# EAGLE board BottomBoards (EAGLE 7.6.0)
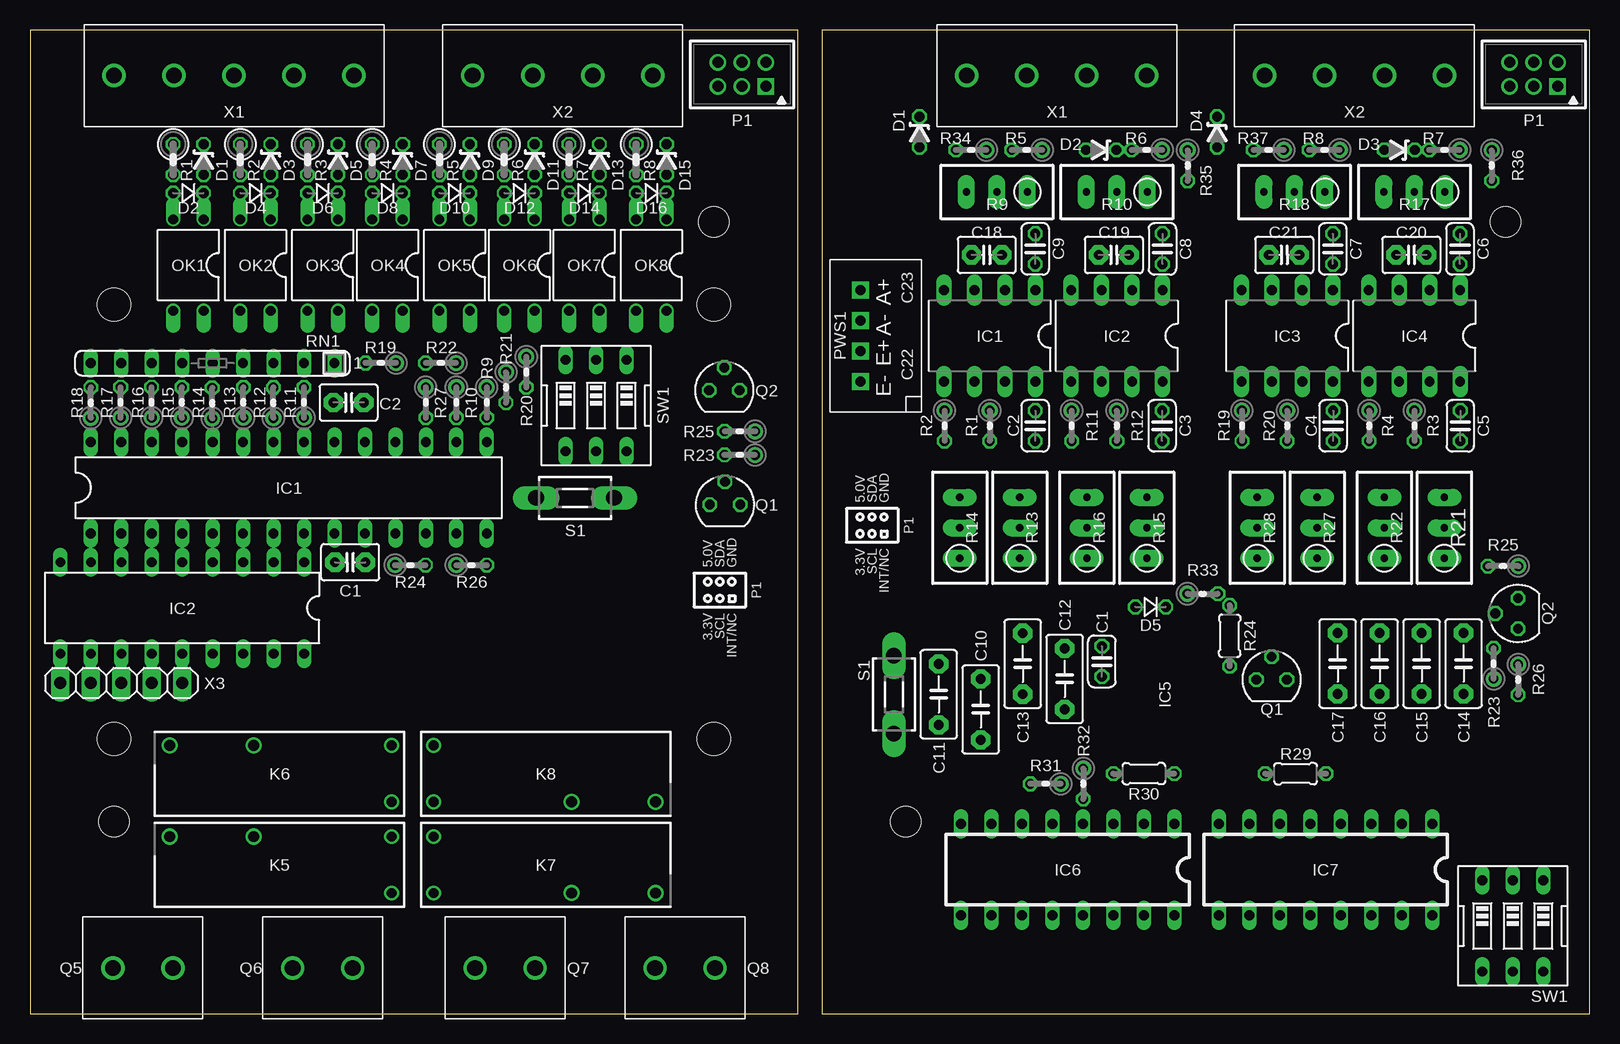
[diagram p0: board, top side]
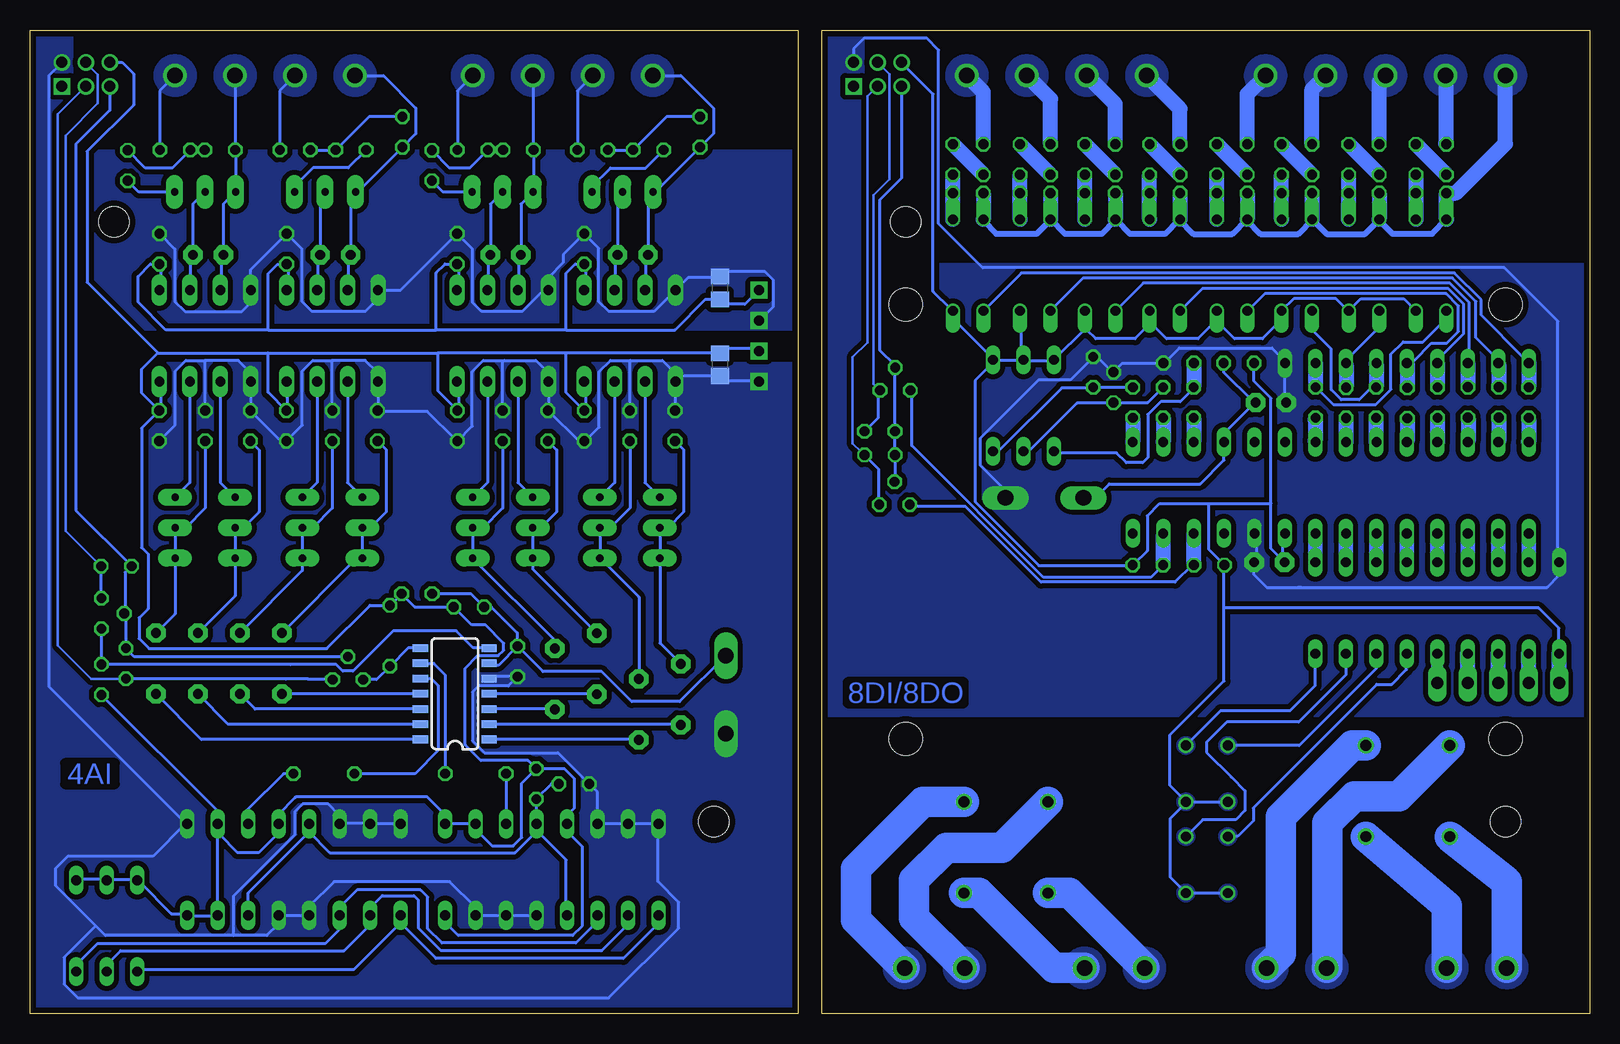
[diagram p1: board, bottom side, seen from below]

Size 130 x 82 mm. Coordinates in mm from the lower left corner, seen from the top.
Outline: 0,0 64,0 64,82 0,82 0,0
Outline: 66,0 130,0 130,82 66,82 66,0
Copper layers (1*16): Top 0.035mm / dielectric 1.6mm / Bottom 0.035mm
Design rules "Elecrow": minimum track width 6mil, minimum drill 12mil, track to track 6mil, track to pad 6mil, pad to pad 6mil, via to via 8mil, smd to smd 0mil, copper to edge 20mil, drill to drill 10mil, minimum pad ring 6mil, minimum via ring 6mil, stop-mask expansion 0mil, vias tented up to drill 100mil, thermal gap 10mil
Holes 2.5 mm at 57,66 7,16 73,16 123,66
Holes 2.75 mm at 57,59.1 57,22.9 7,22.9 7,59.1

## Footprints (pad centres in the part's own frame; a part is rotated, then mirrored left to right if it is on the bottom)
C2.5-3 = drill 0.813 pad 1.6 octagon: 1 -1.27,0; 2 1.27,0
C025-024X044 = drill 0.813 octagon: 1 -1.27,0; 2 1.27,0
C5B3 = drill 0.813 pad 1.6 octagon: 1 -2.54,0; 2 2.54,0
C0805 = smd 1.3 x 1.5: 1 -0.95,0; 2 0.95,0
ZDIO-2.5 = drill 0.813 octagon: A 1.27,0; C -1.27,0
DO35-2V = drill 0.813 octagon: A 1.27,0; C -1.27,0
DIL28-3 = drill 0.813 long: 1 -16.51,-3.81; 2 -13.97,-3.81; 3 -11.43,-3.81; 4 -8.89,-3.81; 5 -6.35,-3.81; 6 -3.81,-3.81; 7 -1.27,-3.81; 8 1.27,-3.81; 9 3.81,-3.81; 10 6.35,-3.81; 11 8.89,-3.81; 12 11.43,-3.81; 13 13.97,-3.81; 14 16.51,-3.81; 15 16.51,3.81; 16 13.97,3.81; 17 11.43,3.81; 18 8.89,3.81; 19 6.35,3.81; 20 3.81,3.81; 21 1.27,3.81; 22 -1.27,3.81; 23 -3.81,3.81; 24 -6.35,3.81; 25 -8.89,3.81; 26 -11.43,3.81; 27 -13.97,3.81; 28 -16.51,3.81
DIL18 = drill 0.813 long: 1 -10.16,-3.81; 2 -7.62,-3.81; 3 -5.08,-3.81; 4 -2.54,-3.81; 5 0,-3.81; 6 2.54,-3.81; 7 5.08,-3.81; 8 7.62,-3.81; 9 10.16,-3.81; 10 10.16,3.81; 11 7.62,3.81; 12 5.08,3.81; 13 2.54,3.81; 14 0,3.81; 15 -2.54,3.81; 16 -5.08,3.81; 17 -7.62,3.81; 18 -10.16,3.81
DIL08 = drill 0.813 pad 1.3 long: 1 -3.81,-3.81; 2 -1.27,-3.81; 3 1.27,-3.81; 4 3.81,-3.81; 5 3.81,3.81; 6 1.27,3.81; 7 -1.27,3.81; 8 -3.81,3.81
14LDSOIC = smd 1.27 x 0.635: 1 -2.87,3.81; 2 -2.87,2.54; 3 -2.87,1.27; 4 -2.87,0; 5 -2.87,-1.27; 6 -2.87,-2.54; 7 -2.87,-3.81; 8 2.87,-3.81; 9 2.87,-2.54; 10 2.87,-1.27; 11 2.87,0; 12 2.87,1.27; 13 2.87,2.54; 14 2.87,3.81
DIL16 = drill 0.813 long: 1 -8.89,-3.81; 2 -6.35,-3.81; 3 -3.81,-3.81; 4 -1.27,-3.81; 5 1.27,-3.81; 6 3.81,-3.81; 7 6.35,-3.81; 8 8.89,-3.81; 9 8.89,3.81; 10 6.35,3.81; 11 3.81,3.81; 12 1.27,3.81; 13 -1.27,3.81; 14 -3.81,3.81; 15 -6.35,3.81; 16 -8.89,3.81
HF46 = drill 0.813: 1 -9.35,2.35; 2 -9.35,-2.35 | drill 0.889: COM 2.15,-2.35 | drill 0.9: NO 9.15,-2.35
DIL04 = drill 0.813 offset: 1 -1.27,-3.81; 2 1.27,-3.81; 3 1.27,3.81; 4 -1.27,3.81
DF11-06DP-2DSA = drill 0.914 square: 1 2,-1 | drill 0.914: 2 2,1; 3 0,-1; 4 0,1; 5 -2,-1; 6 -2,1
TMEXXXXS = drill 0.813 pad 1.397 square: 1 -3.81,1.27; 2 -1.27,1.27; 3 1.27,1.27; 4 3.81,1.27
SOT54E = drill 0.813 octagon: D -1.27,0; G 0,1.905; S 1.27,0
691131710002 = drill 1.3: 1 -2.5,0; 2 2.5,0
0207/2V = drill 0.813 octagon: 1 -1.27,0; 2 1.27,0
0204V = drill 0.813 octagon: 1 -1.27,0; 2 1.27,0
0204/5 = drill 0.813 octagon: 1 -2.54,0; 2 2.54,0
RTRIM3296W = drill 0.61 pad 1.422 long: 1 0,-2.54; 2 0,0; 3 0,2.54
SIL9 = drill 0.813 long: 1 -10.16,0; 2 -7.62,0; 3 -5.08,0; 4 -2.54,0; 5 0,0; 6 2.54,0; 7 5.08,0; 8 7.62,0; 9 10.16,0
DTS-3 = drill 1.3 long: 1 -3.25,0; 2 3.25,0
EDG-03 = drill 0.813 long: 1 -2.54,-3.81; 2 0,-3.81; 3 2.54,-3.81; 4 2.54,3.81; 5 0,3.81; 6 -2.54,3.81
691131710005 = drill 1.3: 1 -10,0; 2 -5,0; 3 0,0; 4 5,0; 5 10,0
691131710004 = drill 1.3: 1 -7.5,0; 2 -2.5,0; 3 2.5,0; 4 7.5,0
1X05 = drill 1.016 long: 1 -5.08,0; 2 -2.54,0; 3 0,0; 4 2.54,0; 5 5.08,0

## Placement (x,y rotation side)
C1  100nF  [C2.5-3]  26.69,37.62 180 top
C2  100nF  [C2.5-3]  26.56,50.94 0 top
C3  100nF  [C025-024X044]  94.37,49 90 top
C4  100nF  [C025-024X044]  108.63,49 90 top
C5  100nF  [C025-024X044]  119.23,49 90 top
C6  100nF  [C025-024X044]  119.2,63.75 90 top
C7  100nF  [C025-024X044]  108.6,63.75 90 top
C8  100nF  [C025-024X044]  94.4,63.75 90 top
C9  100nF  [C025-024X044]  83.8,63.75 90 top
C10  100nF  [C5B3]  79.25,25.35 90 top
C11  100nF  [C025-024X044]  89.35,29.36 270 top
C12  100nF  [C5B3]  86.25,27.9 90 top
C13  100nF  [C5B3]  82.75,29.16 90 top
C14  100nF  [C5B3]  119.5,29.18 270 top
C15  100nF  [C5B3]  116,29.18 270 top
C16  100nF  [C5B3]  112.5,29.18 270 top
C17  100nF  [C5B3]  109,29.18 270 top
C18  10nF  [C2.5-3]  79.75,63.25 0 top
C19  10nF  [C2.5-3]  90.35,63.25 0 top
C20  10nF  [C2.5-3]  115.15,63.25 0 top
C21  100nF  [C025-024X044]  83.8,49 90 top
C22  4.7uF  [C0805]  72.5,54.1 270 bottom
C23  10uF  [C0805]  72.5,60.5 270 bottom
C111  100nF  [C5B3]  75.75,26.61 90 top
C211  10nF  [C2.5-3]  104.55,63.25 0 top
D1  10V  [ZDIO-2.5]  14.47,71.2 270 top
D2  1N4148DO35-2V  [DO35-2V]  13.2,68.4 180 top
D3  10V  [ZDIO-2.5]  20.07,71.2 270 top
D4  1N4148DO35-2V  [DO35-2V]  18.8,68.4 180 top
D5  10V  [ZDIO-2.5]  25.67,71.2 270 top
D6  1N4148DO35-2V  [DO35-2V]  24.4,68.4 180 top
D7  10V  [ZDIO-2.5]  31.07,71.2 270 top
D8  1N4148DO35-2V  [DO35-2V]  29.8,68.4 180 top
D9  10V  [ZDIO-2.5]  36.67,71.2 270 top
D10  1N4148DO35-2V  [DO35-2V]  35.4,68.4 180 top
D11  10V  [ZDIO-2.5]  42.07,71.2 270 top
D12  1N4148DO35-2V  [DO35-2V]  40.8,68.4 180 top
D13  10V  [ZDIO-2.5]  47.47,71.2 270 top
D14  1N4148DO35-2V  [DO35-2V]  46.2,68.4 180 top
D15  10V  [ZDIO-2.5]  53.07,71.2 270 top
D16  1N4148DO35-2V  [DO35-2V]  51.8,68.4 180 top
D17  10V  [ZDIO-2.5]  74.15,73.5 270 top
D21  10V  [ZDIO-2.5]  89.3,72 180 top
D31  10V  [ZDIO-2.5]  114.16,72 180 top
D41  10V  [ZDIO-2.5]  98.95,73.5 270 top
D51  1N4148DO35-2V  [DO35-2V]  93.41,33.9 180 top
IC1  MCP23017SP  [DIL28-3]  21.57,43.84 0 top
IC2  ULN2803A  [DIL18]  12.69,33.81 180 top
IC3  HCPL-7800  [DIL08]  104.8,56.5 180 top
IC4  HCPL-7800  [DIL08]  115.4,56.5 180 top
IC5  MCP3424SOIC  [14LDSOIC]  94.59,26.66 180 bottom
IC6  74HC4051_MUXN  [DIL16]  86.5,12 180 top
IC7  74HC4051_MUXN  [DIL16]  108,12 180 top
IC11  HCPL-7800  [DIL08]  80,56.5 180 top
IC21  HCPL-7800  [DIL08]  90.6,56.5 180 top
K5  HF46105  [HF46]  20.8,12.4 180 top
K6  HF46105  [HF46]  20.8,20 180 top
K7  HF46105  [HF46]  43,12.4 0 top
K8  HF46105  [HF46]  43,20 0 top
OK1  PC817  [DIL04]  13.2,62.4 180 top
OK2  PC817  [DIL04]  18.8,62.4 180 top
OK3  PC817  [DIL04]  24.4,62.4 180 top
OK4  PC817  [DIL04]  29.8,62.4 180 top
OK5  PC817  [DIL04]  35.4,62.4 180 top
OK6  PC817  [DIL04]  40.8,62.4 180 top
OK7  PC817  [DIL04]  46.2,62.4 180 top
OK8  PC817  [DIL04]  51.8,62.4 180 top
P1  DF11-06-2DSA  [DF11-06DP-2DSA]  59.35,78.3 0 top
P11  DF11-06-2DSA  [DF11-06DP-2DSA]  125.35,78.3 0 top
PWS1  TME_0505S  [TMEXXXXS]  70.5,56.5 90 top
Q1  BS170  [SOT54E]  57.93,42.43 0 top
Q2  BS170  [SOT54E]  57.88,51.95 0 top
Q5  691131710002  [691131710002]  9.4,3.8 0 top
Q6  691131710002  [691131710002]  24.4,3.8 0 top
Q7  691131710002  [691131710002]  39.6,3.8 180 top
Q8  691131710002  [691131710002]  54.6,3.8 180 top
Q11  BS170  [SOT54E]  103.5,27.84 0 top
Q21  BS170  [SOT54E]  124.05,33.35 90 top
R1  1K2 0.5W  [0207/2V]  11.93,71.2 270 top
R2  1K2 0.5W  [0207/2V]  17.53,71.2 270 top
R3  1K2 0.5W  [0207/2V]  23.13,71.2 270 top
R4  1K2 0.5W  [0207/2V]  28.53,71.2 270 top
R5  1K2 0.5W  [0207/2V]  34.13,71.2 270 top
R6  1K2 0.5W  [0207/2V]  39.53,71.2 270 top
R7  1K2 0.5W  [0207/2V]  44.93,71.2 270 top
R8  1K2 0.5W  [0207/2V]  50.53,71.2 270 top
R9  1K  [0204V]  38.07,50.94 270 top
R10  1K  [0204V]  35.54,50.94 270 top
R11  1K  [0204V]  22.84,50.94 90 top
R12  1K  [0204V]  20.29,50.92 90 top
R13  1K  [0204V]  17.79,50.94 90 top
R14  1K  [0204V]  15.19,50.89 90 top
R15  1K  [0204V]  12.66,50.94 90 top
R16  1K  [0204V]  10.14,50.95 90 top
R17  1K  [0204V]  7.56,50.95 90 top
R18  1K  [0204V]  5.07,50.93 90 top
R19  10K  [0204V]  29.24,54.23 180 top
R20  10K  [0204V]  41.37,53.48 270 top
R21  10K  [0204V]  39.68,52.2 270 top
R22  10K  [0204V]  34.25,54.23 180 top
R23  1K  [0204V]  59.16,46.57 180 top
R24  1K  [0204V]  31.7,37.39 0 top
R25  1K  [0204V]  59.17,48.54 180 top
R26  1K  [0204V]  36.81,37.39 0 top
R27  1K  [0204V]  32.99,50.94 270 top
R28  1K  [0204V]  76.23,49 270 top
R29  1K  [0204/5]  105.5,20 0 top
R30  1K  [0204/5]  92.85,20 180 top
R31  1K  [0204V]  115.4,49 270 top
R32  4K7  [0204V]  87.8,19.15 270 top
R33  1K  [0204V]  97.75,35 0 top
R34  10K  [0204V]  78.45,72 180 top
R35  10K  [0204V]  96.5,70.7 270 top
R36  10K  [0204V]  121.85,70.7 270 top
R37  10K  [0204V]  103.25,72 180 top
R41  1K  [0204V]  111.63,49 270 top
R51  1K2  [0204V]  83.1,72 180 top
R61  1K2  [0204V]  93.1,72 180 top
R71  1K2  [0204V]  117.9,72 180 top
R81  1K2  [0204V]  107.9,72 180 top
R91  1K  [RTRIM3296W]  80.6,68.5 90 top
R101  1K  [RTRIM3296W]  90.6,68.5 90 top
R110  1K  [0204V]  80,49 270 top
R111  1K  [0204V]  86.83,49 270 top
R121  1K  [0204V]  90.6,49 270 top
R131  1K  [RTRIM3296W]  82.5,40.5 0 top
R141  1K  [RTRIM3296W]  77.5,40.5 0 top
R151  1K  [RTRIM3296W]  93.1,40.5 0 top
R161  1K  [RTRIM3296W]  88.1,40.5 0 top
R171  1K  [RTRIM3296W]  115.4,68.5 90 top
R181  1K  [RTRIM3296W]  105.4,68.5 90 top
R191  1K  [0204V]  101.03,49 270 top
R201  1K  [0204V]  104.8,49 270 top
R211  1K  [RTRIM3296W]  117.9,40.5 0 top
R221  1K  [RTRIM3296W]  112.9,40.5 0 top
R231  1K  [0204V]  122.01,29.18 90 top
R241  1K  [0204/5]  100,31.49 270 top
R251  1K  [0204V]  122.8,37.3 180 top
R261  1K  [0204V]  124.05,27.84 270 top
R271  1K  [RTRIM3296W]  107.3,40.5 0 top
R281  1K  [RTRIM3296W]  102.3,40.5 0 top
R311  4K7  [0204V]  84.65,19.15 180 top
RN1  10K  [SIL9]  15.22,54.22 180 top
S1  DTS-3  [DTS-3]  45.44,42.99 180 top
S11  DTS-3  [DTS-3]  72,26.6 270 top
SW1  [EDG-03]  47.18,50.69 180 top
SW11  [EDG-03]  123.6,7.3 180 top
X1  691131710005  [691131710005]  17,78.2 0 top
X2  691131710004  [691131710004]  44.4,78.2 0 top
X3  [1X05]  7.61,27.55 0 top
X11  691131710004  [691131710004]  85.6,78.2 0 top
X21  691131710004  [691131710004]  110.4,78.2 0 top

## Library data of the parts
C1 C2 = capacitor-wima; MF: MULTICOMP; MPN: MCRR50104X7RK0050; OC_FARNELL: 1216440
C3-C9 C22 C23 R29 R30 R32-R37 = rcl
C10 C12-C20 = capacitor-wima
C11 = rcl; NAME1: C1
C21 = rcl; NAME1: C2
C111 = capacitor-wima; NAME1: C11
C211 = capacitor-wima; NAME1: C21
D1-D16 = diode; OC_FARNELL: unknown
D17 = diode; NAME1: D1
D21 = diode; NAME1: D2
D31 = diode; NAME1: D3
D41 = diode; NAME1: D4
D51 = diode; NAME1: D5
IC1 = microchip; MF: MICROCHIP; MPN: MCP23017-E/SP; OC_FARNELL: 1332088; OC_NEWARK: 31K2959
IC2 = uln-udn; MF: STMICROELECTRONICS; MPN: ULN2803A; OC_FARNELL: 1094428
IC3 IC4 = avago; MPN: HCPL-7800A#500; OC_FARNELL: 459446; OC_NEWARK: 05M6395
IC5 = mcp3424
IC6 IC7 = SparkFun-AnalogIC
IC11 = avago; MPN: HCPL-7800A#500; NAME1: IC1; OC_FARNELL: 459446; OC_NEWARK: 05M6395
IC21 = avago; MPN: HCPL-7800A#500; NAME1: IC2; OC_FARNELL: 459446; OC_NEWARK: 05M6395
K5-K8 = hongfa; OC_FARNELL: unknown; OC_NEWARK: unknown
OK1-OK8 = optocoupler; MF: SHARP; MPN: PC817X4J000F; OC_FARNELL: 9707727; OC_NEWARK: 97K7059
P1 = con-hirose-df11; OC_FARNELL: unknown
P11 = con-hirose-df11; NAME1: P1; OC_FARNELL: unknown
PWS1 = traco-electronic; MPN: TME 0505S; OC_FARNELL: 1007538; OC_NEWARK: 51R5321
Q1 Q2 = transistor-small-signal; MF: ON SEMICONDUCTOR; MPN: BS170G; OC_FARNELL: 9556192
Q5-Q8 X1 X2 = con-wuerth; OC_FARNELL: unknown
Q11 = transistor-small-signal; MF: ON SEMICONDUCTOR; MPN: BS170G; NAME1: Q1; OC_FARNELL: 9556192
Q21 = transistor-small-signal; MF: ON SEMICONDUCTOR; MPN: BS170G; NAME1: Q2; OC_FARNELL: 9556192
R1-R8 = resistor; MF: MULTICOMP; MPN: MCF 0.25W 1K2; OC_FARNELL: 9339124
R9-R22 R27 = resistor; OC_FARNELL: unknown
R23-R26 = rcl; OC_FARNELL: unknown
R28 = rcl; NAME1: R2
R31 = rcl; NAME1: R3
R41 = rcl; NAME1: R4
R51 = rcl; NAME1: R5
R61 = rcl; NAME1: R6
R71 = rcl; NAME1: R7
R81 = rcl; NAME1: R8
R91 = resistor; NAME1: R9
R101 = resistor; NAME1: R10
R110 = rcl; NAME1: R1
R111 = rcl; NAME1: R11
R121 = rcl; NAME1: R12
R131 = resistor; NAME1: R13
R141 = resistor; NAME1: R14
R151 = resistor; NAME1: R15
R161 = resistor; NAME1: R16
R171 = resistor; NAME1: R17
R181 = resistor; NAME1: R18
R191 = rcl; NAME1: R19
R201 = rcl; NAME1: R20
R211 = resistor; NAME1: R21
R221 = resistor; NAME1: R22
R231 = rcl; NAME1: R23; OC_FARNELL: unknown
R241 = rcl; NAME1: R24; OC_FARNELL: unknown
R251 = rcl; NAME1: R25; OC_FARNELL: unknown
R261 = rcl; NAME1: R26; OC_FARNELL: unknown
R271 = resistor; NAME1: R27
R281 = resistor; NAME1: R28
R311 = rcl; NAME1: R31
RN1 = resistor-sil; OC_FARNELL: unknown; OC_NEWARK: unknown
S1 = switch-tact; OC_FARNELL: unknown
S11 = switch-tact; NAME1: S1
SW1 = special; OC_FARNELL: unknown
SW11 = special; NAME1: SW1
X3 = pinhead
X11 = con-wuerth; NAME1: X1
X21 = con-wuerth; NAME1: X2

## Nets
+3V3: P1.5 Q1.G Q2.G R23.2 R25.2
+3V31: P11.5 Q11.G Q21.G R231.2 R251.2
+5V: C1.2 IC1.9 IC2.10 K5.1 K6.1 K7.2 K8.2 OK1.4 OK2.4 OK3.4 OK4.4 OK5.4 OK6.4 OK7.4 OK8.4 P1.6 R19.2 R24.1 R26.2 SW1.1 SW1.2 SW1.3 X3.1
+5V1: C3.2 C4.2 C5.2 C21.2 C22.1 D51.C IC3.8 IC4.8 IC6.1 IC6.2 IC6.5 IC6.16 IC7.2 IC7.4 IC7.15 IC7.16 IC11.8 IC21.8 P11.6 PWS1.2 R32.1 R33.2 R241.1 R261.2 SW11.1 SW11.2 SW11.3
GND: C1.1 C2.1 IC1.10 IC2.9 P1.2 R20.1 R21.1 R22.1 RN1.1 S1.1
GND1: C3.1 C4.1 C5.1 C11.2 C21.1 C22.2 IC3.5 IC4.5 IC5.5 IC6.6 IC6.7 IC6.8 IC6.13 IC6.14 IC6.15 IC7.1 IC7.6 IC7.7 IC7.8 IC7.12 IC7.13 IC11.5 IC21.5 P11.2 PWS1.1 R28.1 R31.1 R41.1 R110.1 R111.1 R121.1 R191.1 R201.1 R311.2 S11.2
N$1: IC1.8 IC2.1
N$2: IC1.7 IC2.2
N$3: IC1.6 IC2.3
N$4: IC1.5 IC2.4
N$5: IC1.4 IC2.5
N$6: IC1.3 IC2.6
N$7: IC1.2 IC2.7
N$8: IC1.1 IC2.8
N$9: D3.C R2.2
N$10: D1.C R1.2
N$11: D2.A D4.A D6.A D8.A D10.A D12.A D14.A D16.A OK1.2 OK2.2 OK3.2 OK4.2 OK5.2 OK6.2 OK7.2 OK8.2 X1.1
N$12: D1.A D2.C OK1.1
N$13: R6.1 X2.2
N$14: R2.1 X1.3
N$15: OK1.3 R11.2 RN1.2
N$16: R3.1 X1.4
N$17: R7.1 X2.3
N$18: R1.1 X1.2
N$19: D3.A D4.C OK2.1
N$20: OK2.3 R12.2 RN1.3
N$21: D5.C R3.2
N$22: R4.1 X1.5
N$23: D5.A D6.C OK3.1
N$24: R5.1 X2.1
N$25: OK3.3 R13.2 RN1.4
N$26: R8.1 X2.4
N$27: D7.C R4.2
N$28: IC2.14 X3.5
N$29: D7.A D8.C OK4.1
N$30: IC2.13 X3.4
N$31: OK4.3 R14.2 RN1.5
N$32: IC2.12 X3.3
N$33: D9.C R5.2
N$34: IC2.11 X3.2
N$35: D9.A D10.C OK5.1
N$36: R22.2 R27.1 SW1.4
N$37: OK5.3 R15.2 RN1.6
N$38: K8.NO Q8.1
N$39: D11.C R6.2
N$40: K8.COM Q8.2
N$41: D11.A D12.C OK6.1
N$42: IC2.15 K5.2
N$43: OK6.3 R16.2 RN1.7
N$44: K7.NO Q7.1
N$45: D13.C R7.2
N$46: K7.COM Q7.2
N$47: D13.A D14.C OK7.1
N$48: IC2.16 K6.2
N$49: OK7.3 R17.2 RN1.8
N$50: IC1.15 R9.2
N$51: D15.C R8.2
N$52: IC1.16 R10.2
N$53: D15.A D16.C OK8.1
N$54: IC2.17 K7.1
N$55: OK8.3 R18.2 RN1.9
N$56: IC2.18 K8.1
N$57: C2.2 IC1.18 R19.1 S1.2
N$58: IC1.12 Q1.D R24.2
N$59: IC1.21 R11.1
N$60: IC1.22 R12.1
N$61: IC1.13 Q2.D R26.1
N$62: IC1.23 R13.1
N$63: IC1.28 R18.1
N$64: IC1.27 R17.1
N$65: IC1.26 R16.1
N$66: K5.NO Q5.1
N$67: IC1.25 R15.1
N$68: IC1.24 R14.1
N$69: P1.4 Q2.S R25.1
N$71: P1.3 Q1.S R23.1
N$75: K5.COM Q5.2
N$77: R9.1 R20.2 SW1.6
N$78: R10.1 R21.2 SW1.5
N$79: IC1.17 R27.2
N$81: C6.1 C7.1 C8.1 C9.1 C23.2 IC3.1 IC4.1 IC11.1 IC21.1 PWS1.4
N$88: K6.NO Q6.1
N$89: K6.COM Q6.2
N$91: IC5.10 R29.1
N$101: IC5.9 R30.1
N$110: C14.2 IC5.14
N$111: C18.2 IC11.2 R91.2
N$121: C19.2 IC21.2 R101.2
N$131: C10.1 IC5.1
N$141: C20.2 IC4.2 R171.2
N$151: C111.1 IC5.2
N$161: C211.1 D41.A IC3.3 R181.3 X21.1
N$171: C12.1 IC5.3
N$181: C12.2 R121.2 R151.1 R151.2
N$191: C211.2 IC3.2 R181.2
N$201: R61.1 X11.4
N$210: C15.2 IC5.13
N$211: D21.C R35.1 R61.2
N$221: IC11.7 R131.3
N$231: IC11.6 R141.3
N$241: C10.2 R110.2 R131.1 R131.2
N$251: IC21.6 R161.3
N$261: IC21.7 R151.3
N$271: C111.2 R28.2 R141.1 R141.2
N$281: R71.1 X21.4
N$291: C13.2 R111.2 R161.1 R161.2
N$301: C18.1 D17.A IC11.3 R91.3 X11.1
N$310: C16.2 IC5.12
N$311: C13.1 IC5.4
N$321: D31.C R36.1 R71.2
N$331: C6.2 C7.2 C8.2 C9.2 C23.1 IC3.4 IC4.4 IC11.4 IC21.4 PWS1.3
N$341: R81.1 X21.2
N$351: D41.C R37.1 R81.2
N$361: IC7.3 R29.2
N$371: IC6.9 IC7.9 SW11.4
N$381: IC4.7 R211.3
N$391: IC4.6 R221.3
N$401: C15.1 R41.2 R221.1 R221.2
N$410: C17.2 IC5.11
N$411: C20.1 D31.A IC4.3 R171.3 X21.3
N$421: C14.1 R31.2 R211.1 R211.2
N$431: IC3.6 R281.3
N$441: IC3.7 R271.3
N$451: C17.1 R191.2 R281.1 R281.2
N$461: C16.1 R201.2 R271.1 R271.2
N$471: IC6.10 IC7.10 SW11.5
N$481: IC6.11 IC7.11 SW11.6
N$491: IC6.3 R30.2
N$510: C19.1 D21.A IC21.3 R101.3 X11.3
N$511: IC6.4 IC6.12 IC7.5 IC7.14 R32.2 R311.1
N$521: C11.1 D51.A IC5.6 R33.1 S11.1
N$531: R34.2 R91.1
N$541: R35.2 R101.1
N$551: R36.2 R171.1
N$561: R37.2 R181.1
N$581: IC5.8 Q11.D R241.2
N$610: R51.1 X11.2
N$611: IC5.7 Q21.D R261.1
N$691: P11.4 Q21.S R251.1
N$710: D17.C R34.1 R51.2
N$711: P11.3 Q11.S R231.1

## Tracks (layer width: path | path; a pad name or v marks a point on that pad's centre or on a via)
+3V3
  Bottom 0.254: Q1.G 57.91,44.5 57.91,46.53 R23.2 57.91,46.74 57.91,48.36 R25.2 57.91,48.56 57.91,53.85 Q2.G 57.91,54.05 59.13,55.27 59.13,67.87 57.51,69.49 57.35,69.65 P1.5
+3V31
  Bottom 0.203: Q21.G 122.12,33.36 122.01,33.36
  Bottom 0.254: R251.2 121.68,37.19 122.08,36.78 122.08,33.53 122.01,33.45 122.01,33.36 R231.2 | 121.47,37.39 R251.2 | 122.03,30.45 R231.2 | Q11.G 121.31,29.75 R231.2 | R251.2 126.17,41.94 126.17,72.49 123.35,75.31 P11.5
+5V
  Bottom 0.203: IC1.9 25.45,40.08 25.44,40.04
  Bottom 0.254: 25.56,39.99 25.56,38.09 25.6,38 25.56,37.88 25.56,37.76 C1.2 26.56,38.76 26.56,42.53 | K8.2 33.73,17.47 34.96,16.24 34.96,11.39 33.73,10.16 K7.2 K5.1 | SW1.2 47.14,54.46 44.7,54.46 SW1.3 44.56,54.6 42.08,57.08 OK6.4 41.96,57.04 41.84,56.95 41.15,56.26 37.89,56.26 36.67,57.48 OK5.4 36.69,57.69 35.26,56.26 32.64,56.26 31.09,57.81 OK4.4 31.06,57.73 29.59,56.26 27.26,56.26 25.67,57.85 OK3.4 | SW1.1 49.58,54.46 47.35,54.46 SW1.2 | OK7.4 47.35,58.52 47.35,54.66 SW1.2 | OK1.4 14.47,58.57 15.5,59.6 19.06,59.6 OK2.4 20.18,58.64 21.14,59.6 24.66,59.6 OK3.4 | OK3.4 | 25.6,40.03 25.56,39.99 | 25.81,58.52 OK3.4 | IC1.9 25.44,40.04 25.56,39.99 | SW1.1 49.78,54.66 53.03,57.91 53.03,58.52 OK8.4 53.24,58.73 54.71,60.2 54.71,76.65 P1.6 57.3,79.25 P1.6 | 49.78,54.46 SW1.1 | R24.1 | 30.47,33.79 30.47,27.72 34.96,23.23 34.96,19.01 33.72,17.77 K8.2 | IC2.10 2.56,30.74 2.56,32.14 4.23,33.81 30.45,33.81 30.47,33.79 | 49.84,54.34 SW1.1 | 30.47,33.79 30.47,37.39 R24.1 | 49.78,54.25 SW1.1 | 26.56,42.53 26.56,51.31 27.96,52.71 R19.2 | SW1.1 49.84,54.14 51.22,52.76 51.22,42.67 45.9,37.35 38.14,37.35 R26.2 38.01,37.42 36.86,38.57 36.86,41.49 35.84,42.51 31.71,42.51 | 31.71,42.51 26.58,42.51 26.56,42.53 | R24.1 31.71,38.67 31.71,42.51 | K8.2 K6.1
  Bottom 1.016: X3.1 2.54,27.26
  Bottom 1.27: 2.54,27.26 IC2.10
  pour Bottom (no thermals): 29.67,9.58 arc180 30.63,10.52 arc180
  pour Bottom (no thermals): 33.17,9.58 arc180 34.13,10.52 arc180
  pour Bottom (no thermals): 33.17,17.18 arc180 34.13,18.12 arc180
  pour Bottom (no thermals): 29.67,17.18 arc180 30.63,18.12 arc180
+5V1
  Bottom 0.254: 85.32,55.07 96,55.07 | 119.33,55.07 110.16,55.07 | 110.16,55.07 96,55.07 | 85.32,55.07 85.32,51.79 C21.2 83.67,50.43 83.67,52.03 83.61,52.49 IC11.8 | 96,55.07 96,51.9 C3.2 94.37,50.47 94.25,50.59 94.25,52.35 IC21.8 | 110.16,55.07 110.16,51.8 C4.2 108.51,50.39 108.51,52.59 IC3.8 | IC6.1 95.26,15.85 93.03,15.85 IC6.2 92.85,15.34 91.49,13.98 89.74,13.98 89.72,13.96 89.01,14.67 89.01,19.19 87.8,20.4 R32.1 | SW11.1 125.94,11.18 123.71,11.18 SW11.2 123.51,11.18 121.07,11.18 SW11.3 120.86,10.97 118.22,8.33 117,8.33 IC7.16 116.8,8.13 114.36,8.13 IC7.15 114.35,14.77 114.2,14.92 | IC4.8 119.1,52.58 119.1,50.4 C5.2 | R32.1 85.47,20.42 84.66,19.61 84.66,17.09 85.22,16.53 IC6.5 | 95.26,8.13 IC6.16 95.37,8.17 95.37,7.56 94.31,6.5 84.77,6.5 83.95,7.32 83.95,13.91 85.22,15.18 IC6.5 | 85.1,15.65 IC6.5 | IC7.4 109.28,15.65 109.28,15.07 110.94,13.41 112.69,13.41 114.2,14.92 | 114.16,15.65 IC7.2 | 95.46,15.85 IC6.1 | 109.28,15.85 IC7.4 | 119.24,50.19 C5.2 | IC7.2 114.36,15.85 114.36,16.88 R261.2 | IC7.4 109.29,15.83 109.29,16.62 107.97,17.94 107.95,17.94 107.84,18.05 96.89,18.05 95.4,16.56 IC6.1 | 114.2,14.92 114.32,15.04 114.32,15.78 IC7.2 | P11.6 122.33,79.3 121.37,78.34 121.37,75.74 125.23,71.88 125.23,60.97 119.33,55.07 | C5.2 120.69,51.73 120.69,53.72 119.34,55.07 119.33,55.07 | R32.1 88.48,21.1 92.42,21.1 93.72,22.4 93.72,28.79 92.67,29.84 90.96,29.84 90.51,30.29 90.51,30.87 92.04,32.4 93.18,32.4 D51.C 97.92,33.9 R33.2 R241.1 101.66,34.03 105.26,30.43 120.08,30.43 120.91,31.26 120.91,33 120.16,33.75 120.16,38.32 120.69,38.85 120.69,48.81 C5.2 | 85.32,55.07 72.52,55.07 C22.1 72.12,55.44 69.44,55.44 PWS1.2
GND
  Bottom 0.254: 28,37.59 27.98,37.76 | 27.74,40.02 27.74,37.67 C1.1 27.96,36.59 26.91,35.54 24.28,35.54 | 27.74,40.02 27.74,40.37 | 24.28,35.54 3.54,35.54 2.53,36.55 IC2.9 2.64,37.8 2.64,57.71 7.11,62.18 50.6,62.18 54.25,65.84 54.25,80.33 55.25,81.32 60.46,81.32 61.35,80.43 P1.2 | 27.74,40.02 IC1.10 | S1.1 48.77,43.08 48.77,43.69 50.8,45.72 50.8,47.95 45.92,52.83 43.28,52.83 41.45,54.66 R20.1 41.02,54.74 39.8,53.52 R21.1 38.94,54.22 R22.1 35.4,54.28 34.19,55.49 26.46,55.49 25.35,54.38 25.5,54.26 RN1.1 25.38,50.98 C2.1 25.38,50.82 | 24.06,35.53 24.28,35.54
  Bottom 0.508: 27.97,37.84 C1.1
  Bottom 1.016: 27.97,37.84 27.98,37.76
  pour Bottom (isolate 0.406, no thermals): 0,62.5 64,62.5 64,24.8 0,24.8
  pour Bottom (isolate 0.406, no thermals): 60.5,82 64,82 64,24.8 29.5,24.8 29.5,62.5 60.5,62.5
GND1
  Bottom 0.203: 113.05,6.62 113.06,6.62 113.06,6.5
  Bottom 0.254: 76.23,52.69 R28.1 | IC21.5 86.79,50.31 R111.1 86.73,50.19 84.29,47.75 83.88,47.75 C21.1 83.68,47.75 82.55,48.88 82.55,53.52 81.62,54.45 79.96,54.45 | 86.93,52.83 IC21.5 | 94.25,47.75 C3.1 | IC6.8 77.79,15.85 80.02,15.85 IC6.7 | IC7.8 99.12,15.85 101.56,15.85 IC7.7 101.76,15.85 104,15.85 IC7.6 | C3.1 93.14,48.96 93.14,53.52 92.21,54.45 90.47,54.45 | 90.47,54.45 87.83,54.45 86.82,53.44 86.82,52.72 IC21.5 | R121.1 90.6,54.32 90.47,54.45 | 79.96,54.45 77.28,54.45 76.24,53.41 76.24,52.74 | R110.1 80,54.41 79.96,54.45 | 80.13,15.83 IC6.7 | 109.29,8.83 109.29,8.74 | 109.29,8.74 109.29,8.21 | 109.27,8.7 109.26,8.71 109.28,8.74 | 87.74,8.33 IC6.13 87.98,8.19 90.21,8.19 IC6.14 90.38,8.13 92.82,8.13 IC6.15 | IC7.12 106.78,8.19 109.02,8.19 IC7.13 | 91.36,27.93 IC5.5 91.45,27.93 91.29,28.09 C11.2 | IC6.7 IC6.6 | 109.28,8.74 109.29,8.74 | 109.28,8.74 IC7.13 | 104.85,54.45 106.43,54.45 107.3,53.58 107.3,49.06 C4.1 109.09,47.73 R41.1 111.59,50.31 IC4.5 111.59,53.4 112.64,54.45 115.4,54.45 | 104.85,54.45 102.06,54.45 100.99,53.38 IC3.5 100.99,50.31 R191.1 100.95,50.19 96.89,50.19 94.45,47.75 C3.1 | R201.1 104.8,54.4 104.85,54.45 | C5.1 117.91,49.05 117.91,53.55 117.01,54.45 115.4,54.45 | R31.1 115.4,54.45 | IC6.6 82.69,18.46 R311.2 85.98,21.75 92.12,21.75 93.11,22.74 93.11,26.81 92.61,27.31 90.13,27.31 C11.2 | 94.45,47.55 C3.1 | 89.17,28.25 C11.2 | P11.2 127.37,79.25 128.38,78.23 128.38,27.23 117,15.85 IC7.1 117.05,15.81 119.75,13.11 126.84,13.11 127.88,12.07 127.88,10.67 124.52,7.32 | 93.03,8.33 IC6.15 | 106.64,8.33 IC7.12 | 104.2,15.85 IC7.6 | 109.28,8.13 IC7.13 | 82.87,15.65 IC6.6 | 124.52,7.32 123.71,6.5 113.06,6.5 110.27,6.5 109.28,7.49 IC7.13
  Bottom 0.254: IC7.6 104.17,15.83 104.17,16.5 105.13,17.46 107.29,17.46 107.93,16.82 107.93,14.91 113.05,9.79 113.05,6.62 113.05,6.6 | 124.52,7.32 127.16,4.67 127.16,2.44 126.02,1.29 81.76,1.29 75.93,7.12 75.93,9.28 77.66,11.01 77.66,15.54 IC6.8 | 77.58,15.65 IC6.8 | IC7.12 106.72,8.94 104.66,11 95.01,11 92.85,8.84 IC6.15 | C3.1 | PWS1.1 69.25,52.71 72.06,52.71 C22.2 75.73,53.15 IC11.5
  pour Bottom (isolate 0.406, no thermals): 66,54.25 130,54.25 130,0 66,0
  pour Bottom (isolate 0.406, no thermals): 126.5,54.25 95.5,54.25 95.5,0 130,0 130,82 126.5,82
N$1
  Bottom 0.508: 22.86,40.34 IC1.8
  Bottom 1.2: 22.86,40.34 IC2.1
N$2
  Bottom 0.508: 20.32,40.35 IC1.7
  Bottom 1.2: 20.32,40.35 IC2.2
N$3
  Bottom 0.508: 17.77,40.4 IC1.6
  Bottom 1.2: 17.77,40.4 IC2.3
N$4
  Bottom 0.508: 15.23,40.35 IC1.5
  Bottom 1.2: 15.23,40.35 IC2.4
N$5
  Bottom 0.508: 12.7,40.24 IC1.4
  Bottom 1.2: 12.7,40.24 IC2.5
N$6
  Bottom 0.508: 10.15,40.53 IC1.3
  Bottom 1.2: 10.15,40.53 IC2.6
N$7
  Bottom 0.508: 7.62,40.6 IC1.2
  Bottom 1.2: 7.62,40.6 IC2.7
N$8
  Bottom 0.508: 5.08,40.37 IC1.1
  Bottom 1.2: 5.08,40.37 IC2.8
N$9
  Bottom 1.27: R2.2 D3.C
N$10
  Bottom 1.27: R1.2 D1.C
N$11
  Bottom 0.508: 12.2,66.2 OK1.2 13.14,65 16.4,65 17.56,66.16 OK2.2 17.54,66.14 17.57,66.14 18.71,65 21.91,65 23.11,66.2 | 23.11,66.2 23.1,66.19 24.29,65 27.43,65 28.58,66.15 OK4.2 28.57,66.22 29.79,65 33.01,65 34.19,66.18 | 23.11,66.2 OK3.2 | 34.19,66.18 OK5.2 | 34.19,66.18 34.24,66.23 34.23,66.19 35.41,65 38.3,65 39.39,66.08 39.62,66.14 OK6.2 39.57,66.09 40.66,65 43.72,65 OK7.2 44.91,66.2 46.11,65 49.45,65 50.5,66.05 50.6,66.11 OK8.2
  Bottom 1.27: OK1.2 D2.A 11.13,68.4 7.01,72.52 X1.1 | D4.A OK2.2 | D6.A OK3.2 | D8.A OK4.2 | D10.A OK5.2 | D12.A OK6.2 | D16.A OK8.2 | D14.A OK7.2
  pour Bottom (no thermals): 5.9,77 arc180 8.1,79.4 arc180
N$12
  Bottom 1.27: D1.A D2.C OK1.1
N$13
  Bottom 1.27: R6.1 39.53,75.83 X2.2
  pour Bottom (no thermals): 40.8,77 arc180 43,79.4 arc180
N$14
  Bottom 1.27: R2.1 17.53,77.67 X1.3
  pour Bottom (no thermals): 15.9,77 arc180 18.1,79.4 arc180
N$15
  Bottom 0.254: OK1.3 11.95,57.93 13.89,55.99 15.54,55.99 16.55,54.98 16.55,52.03 17.82,50.76 21.34,50.76 22.64,52.06 R11.2
  Bottom 0.508: 22.84,52.3 R11.2 | 22.84,54.17 RN1.2
  Bottom 1.27: 22.84,54.17 22.84,52.3
N$16
  Bottom 1.27: R3.1 23.13,77.07 X1.4
  pour Bottom (no thermals): 20.9,77 arc180 23.1,79.4 arc180
N$17
  Bottom 1.27: R7.1 44.93,76.23 X2.3
  pour Bottom (no thermals): 45.8,77 arc180 48,79.4 arc180
N$18
  Bottom 1.27: X1.2 12,72.54 R1.1
  pour Bottom (no thermals): 10.9,77 arc180 13.1,79.4 arc180
N$19
  Bottom 1.27: OK2.1 D4.C D3.A
N$20
  Bottom 0.254: OK2.3 17.54,57.22 20.06,54.7 RN1.3 20.32,54.05 20.29,54.05 | 20.29,52.27 20.32,52.22 R12.2
  Bottom 1.2: 20.29,54.1 20.29,54.05
  Bottom 1.27: 20.29,54.05 20.29,52.27
N$21
  Bottom 1.27: R3.2 D5.C
N$22
  Bottom 1.27: R4.1 28.53,76.67 X1.5
  pour Bottom (no thermals): 25.9,77 arc180 28.1,79.4 arc180
N$23
  Bottom 1.27: OK3.1 D6.C D5.A
N$24
  Bottom 1.27: R5.1 34.13,75.43 X2.1
  pour Bottom (no thermals): 35.8,77 arc180 38,79.4 arc180
N$25
  Bottom 0.254: OK3.3 23.14,57.94 23.14,57.01 21.54,55.41 21.54,52.02 20.7,51.18 19.2,51.18 18.36,52.02 R13.2
  Bottom 0.508: 23.2,58.4 OK3.3 23.2,58.2 | 17.77,52.28 R13.2 | 17.77,54.16 RN1.4
  Bottom 1.27: 17.77,54.16 17.77,52.28
N$26
  Bottom 1.27: R8.1 50.53,76.83 X2.4
  pour Bottom (no thermals): 50.8,77 arc180 53,79.4 arc180
N$27
  Bottom 1.27: R4.2 D7.C
N$28
  Bottom 1.016: X3.5 12.7,27.26 IC2.14
N$29
  Bottom 1.27: OK4.1 D8.C D7.A
N$30
  Bottom 1.016: X3.4 10.15,27.26
  Bottom 1.27: 10.15,27.26 IC2.13
N$31
  Bottom 0.254: OK4.3 28.28,58.68 28.53,58.57 27.08,60.02 11.94,60.02 10.92,59 10.92,56.86 11.9,55.88 13.18,55.88 14.62,54.44 RN1.5
  Bottom 0.508: 28.54,57.92 OK4.3 | 15.2,52.3 R14.2 | 15.2,54.17 RN1.5
  Bottom 1.27: 15.2,54.17 15.2,52.3
N$32
  Bottom 1.016: X3.3 7.62,27.26
  Bottom 1.27: 7.62,27.26 IC2.12
N$33
  Bottom 1.27: R5.2 D9.C
N$34
  Bottom 1.016: X3.2 5.08,27.26
  Bottom 1.27: 5.08,27.26 IC2.11
N$35
  Bottom 1.27: OK5.1 D10.C D9.A
N$36
  Bottom 0.254: R27.1 33.12,52.02 34.12,51.02 35.75,51.02 36.83,49.94 36.83,46.34 37.24,45.92 38.61,45.92 39.42,46.74 44.5,46.74 SW1.4
  Bottom 1.27: R22.2 R27.1
N$37
  Bottom 0.254: OK5.3 34.11,58.59 32.26,60.44 11.78,60.44 10.5,59.16 10.5,56.68 12.44,54.74 RN1.6
  Bottom 0.508: 12.68,52.27 R15.2 | 12.68,54.15 RN1.6
  Bottom 1.27: 12.68,54.15 12.68,52.27
N$38
  Bottom 2.54: Q8.1 57.13,3.8 61.12,7.79 61.16,7.83 61.16,12.06 55.57,17.65 K8.NO
  pour Bottom (no thermals): 56,2.6 arc180 58.2,5 arc180
N$39
  Bottom 1.27: R6.2 D11.C
N$40
  Bottom 2.54: K8.COM 48.97,13.83 53.61,13.83 56.3,11.14 56.3,8 Q8.2
  pour Bottom (no thermals): 51,2.6 arc180 53.2,5 arc180
N$41
  Bottom 1.27: OK6.1 D12.C D11.A
N$42
  Bottom 0.254: 30.15,14.78 K5.2 30.12,14.78 29.32,14.78 28.04,16.06 28.04,17.14 17.73,27.45 16.5,27.45 15.27,28.68 15.27,29.96 IC2.15
  pour Bottom (no thermals): 29.67,14.28 arc180 30.63,15.22 arc180
N$43
  Bottom 0.254: OK6.3 39.16,58.72 39.53,58.57 37.2,60.9 11.66,60.9 10.04,59.28 10.04,54.74 RN1.7
  Bottom 0.508: 39.4,58.6 OK6.3 | 10.13,52.27 R16.2 | 10.13,54.15 RN1.7
  Bottom 1.27: 10.13,54.15 10.13,52.27
N$44
  Bottom 2.54: K7.NO 50.89,10.05 44.64,3.8 Q7.1
  pour Bottom (no thermals): 41,2.6 arc180 43.2,5 arc180
N$45
  Bottom 1.27: R7.2 D13.C
N$46
  Bottom 2.54: K7.COM 43.35,10.05 Q7.2
  pour Bottom (no thermals): 36,2.6 arc180 38.2,5 arc180
N$47
  Bottom 1.27: OK7.1 D14.C D13.A
N$48
  Bottom 0.254: IC2.16 17.77,28.75 24.19,22.34 K6.2
  pour Bottom (no thermals): 29.67,21.88 arc180 30.63,22.82 arc180
N$49
  Bottom 0.254: OK7.3 44.92,58.62 42.22,61.32 11.42,61.32 9.46,59.36 9.46,56.34 7.82,54.7 RN1.8
  Bottom 0.508: 7.58,52.23 R17.2 | 7.58,54.1 RN1.8
  Bottom 1.27: 7.58,54.1 7.58,52.23
N$50
  Bottom 0.254: R9.2
  Bottom 1.27: R9.2 IC1.15
N$51
  Bottom 1.27: R8.2 D15.C
N$52
  Bottom 1.27: R10.2 IC1.16
N$53
  Bottom 1.27: OK8.1 D16.C D15.A
N$54
  Bottom 0.254: K7.1 33.63,14.75 32.23,16.15 29.49,16.15 28.72,16.92 28.72,18.58 29.86,19.72 31.92,21.78 31.92,22.61 30.23,24.3 24.24,24.3 20.32,28.23 IC2.17
  pour Bottom (no thermals): 33.17,14.28 arc180 34.13,15.22 arc180
N$55
  Bottom 0.254: RN1.9 5.46,54.66 9.04,58.24 9.04,59.52 11.26,61.74 47.36,61.74 50.56,58.54 OK8.3 | R18.2 5.08,52.22 5.06,52.38
  Bottom 1.27: RN1.9 5.06,52.38
N$56
  Bottom 0.254: K8.1 30.74,25.26 28.11,25.26 24.95,25.26 22.86,27.35 IC2.18
  pour Bottom (no thermals): 33.17,21.88 arc180 34.13,22.82 arc180
N$57
  Bottom 0.254: R19.1 30.48,54.05 30.48,53.44 28.04,51 C2.2 28.04,50.8 30.28,48.56 30.28,47.75 IC1.18 | 30.48,47.55 IC1.18 | S1.2 41.21,42.99 40.04,44.16 32.44,44.16 30.47,46.13 IC1.18
N$58
  Bottom 0.254: 33,37.64 R24.2 | 33,39.88 IC1.12 | 32.92,37.39 R24.2 | Q1.D 56.49,42.27 52.02,42.27 45.72,35.97 34.54,35.97 33.12,37.39 R24.2
  Bottom 1.27: 33,39.88 33,37.64
N$59
  Bottom 0.254: IC1.21 22.96,47.75 22.86,47.75
  Bottom 0.508: 22.86,49.51 R11.1
  Bottom 1.2: 22.86,47.75 22.86,47.63
  Bottom 1.27: 22.86,49.51 22.86,47.75
N$60
  Bottom 0.508: IC1.22 | 20.3,49.53 R12.1
  Bottom 1.27: 20.3,49.53 IC1.22
N$61
  Bottom 0.254: 35.56,37.57 R26.1 35.56,37.39 36.58,36.37 45.52,36.37 56.49,47.35 56.49,51.82 Q2.D | 35.56,39.81 IC1.13
  Bottom 1.27: 35.56,39.81 35.56,37.57
N$62
  Bottom 0.508: 17.8,47.67 IC1.23 | 17.8,49.55 R13.1
  Bottom 1.27: 17.8,49.55 17.8,47.67
N$63
  Bottom 0.508: 5.08,47.66 IC1.28 | 5.08,49.53 R18.1
  Bottom 1.27: 5.08,49.53 5.08,47.66
N$64
  Bottom 0.508: 7.58,47.71 IC1.27 | 7.58,49.59 R17.1
  Bottom 1.27: 7.58,49.59 7.58,47.71
N$65
  Bottom 0.508: 10.12,47.75 IC1.26 | 10.12,49.62 R16.1
  Bottom 1.27: 10.12,49.62 10.12,47.75
N$66
  Bottom 2.54: K5.NO 6.9,11 Q5.1
  pour Bottom (no thermals): 5.8,2.6 arc180 8,5 arc180
N$67
  Bottom 0.508: 12.68,47.67 IC1.25 | 12.68,49.55 R15.1
  Bottom 1.27: 12.68,49.55 12.68,47.67
N$68
  Bottom 0.508: 15.2,47.73 IC1.24 | 15.2,49.48 R14.1
  Bottom 1.27: 15.2,49.48 15.2,47.73
N$69
  Bottom 0.203: 59.28,51.82 Q2.S 59.25,52.02 59.7,52.47 59.7,68.23 58.35,69.58 58.35,78.3 P1.4 | 60.35,48.62 R25.1
  Bottom 0.254: 59.28,51.82 59.28,49.68 60.35,48.62
N$71
  Bottom 0.203: P1.3 60.18,76.48 60.18,56 60.2,55.93 61.42,54.71 61.42,47.54 60.71,46.83 60.5,46.63 R23.1 60.35,46.48 | 59.28,42.52 Q1.S
  Bottom 0.254: 59.28,42.52 59.28,45.41 60.35,46.48
N$75
  Bottom 2.54: K5.COM 11.9,9 Q5.2
  pour Bottom (no thermals): 10.8,2.6 arc180 13,5 arc180
N$77
  Bottom 0.254: R9.1 R20.2 41.48,52.16 43.98,52.16 49.26,46.88 SW1.6
N$78
  Bottom 0.254: R10.1 35.57,52.2 36.83,50.94 R21.2 39.8,50.88 42.72,50.88 46.72,46.88 SW1.5
N$79
  Bottom 0.254: R27.2
  Bottom 1.27: R27.2 IC1.17
N$81
  Bottom 0.254: 94.45,60.15 IC21.1 94.41,60.76 94.28,60.89 94.28,62.36 C8.1 95.41,62.49 96.13,61.77 96.13,57 | IC3.1 108.61,60.73 108.48,60.86 108.48,62.36 C7.1 109.36,62.47 110.13,61.7 110.13,57 | 110.13,57 96.13,57 | IC11.1 83.81,60.7 83.67,60.84 83.67,62.35 C9.1 84.55,62.49 85.3,61.74 85.3,57 | IC4.1 119.21,60.79 119.09,60.91 119.09,62.37 C6.1 119.97,62.48 121,61.45 121,59.33 118.67,57 110.13,57 | 85.3,57 96.13,57 | 85.3,57 76.24,57 73.69,59.55 C23.2 72.4,59.55 71.98,59.13 70.41,59.13 PWS1.4
N$88
  Bottom 2.54: K6.NO 15.88,18.12 17.48,18.12 19.61,18.12 21.85,15.88 21.85,3.85 Q6.1
  pour Bottom (no thermals): 20.8,2.6 arc180 23,5 arc180
N$89
  Bottom 2.54: K6.COM 19.78,22.35 25.73,16.4 25.73,4.97 Q6.2
  pour Bottom (no thermals): 25.8,2.6 arc180 28,5 arc180
N$91
  Bottom 0.254: IC5.10 96.57,27.93 95.99,27.35 95.99,21.92 97.91,20 R29.1
N$101
  Bottom 0.254: IC5.9 96.35,29.2 95.4,28.25 R30.1
N$110
  Bottom 0.254: IC5.14 115.71,22.85 C14.2
N$111
  Bottom 0.254: R91.2 81.02,68.08 C18.2 81.22,63.05 81.22,60.84 81.27,60.79 IC11.2
N$121
  Bottom 0.254: R101.2 91.62,67.48 C19.2 91.83,63.04 91.83,61.07 91.87,61.03 IC21.2
N$131
  Bottom 0.254: 91.74,22.8 IC5.1 79.29,22.85 C10.1
N$141
  Bottom 0.254: R171.2 116.42,67.48 C20.2 116.63,63.04 116.63,61.1 116.67,61.06 IC4.2
N$151
  Bottom 0.254: 91.75,24.08 IC5.2 75.8,24.12 C111.1
N$161
  Bottom 0.254: X21.1 100.54,78.2 97.84,75.5 97.84,73.34 D41.A 102.68,68.5 | 102.68,68.5 R181.3 | 102.68,68.5 103.28,67.9 C211.1 103.49,63.04 103.49,60.91 103.53,60.87 IC3.3
  pour Bottom (no thermals): 101.8,77 arc180 104,79.4 arc180
N$171
  Bottom 0.254: 91.77,25.37 IC5.3 86.28,25.39 C12.1
N$181
  Bottom 0.254: 93.1,37.94 93.1,40.38 R151.2 92.24,40.5 90.6,42.14 R121.2 | 93.1,37.94 R151.1 | 93.1,37.94 86.25,31.09 C12.2
N$191
  Bottom 0.254: R181.2 105.82,68.08 C211.2 106.02,63.05 106.02,61.08 106.07,61.03 IC3.2
N$201
  Bottom 0.254: X11.4 94.37,76.93 R61.1
  pour Bottom (no thermals): 92,77 arc180 94.2,79.4 arc180
N$210
  Bottom 0.254: IC5.13 113.48,24.12 C15.2
N$211
  Bottom 0.254: D21.C R61.2 93.34,70.5 95.03,70.5 R35.1
N$221
  Bottom 0.254: IC11.7 81.27,44.27 R131.3
N$231
  Bottom 0.254: IC11.6 78.73,44.27 R141.3
N$241
  Bottom 0.254: R110.2 80,42.13 81.63,40.5 R131.2 82.49,40.46 82.49,38.02 R131.1 79.25,34.71 C10.2
N$251
  Bottom 0.254: IC21.6 89.33,44.27 R161.3
N$261
  Bottom 0.254: IC21.7 91.87,44.27 R151.3
N$271
  Bottom 0.254: R28.2 75.51,47.01 75.51,41.82 76.83,40.5 R141.2 R141.1 77.48,37.94 77.48,30.88 C111.2
N$281
  Bottom 0.254: X21.4 119.17,76.93 R71.1
  pour Bottom (no thermals): 116.8,77 arc180 119,79.4 arc180
N$291
  Bottom 0.254: R161.1 88.09,38 88.09,40.44 R161.2 87.42,40.5 86.1,41.82 86.1,47 R111.2 | 88.12,37.94 R161.1 | R161.1 88.1,37.05 C13.2
N$301
  Bottom 0.254: X11.1 75.74,78.2 73.04,75.5 73.04,73.34 D17.A 77.88,68.5 R91.3 78.48,68.08 C18.1 78.69,63.04 78.69,60.96 78.73,60.92 IC11.3
  pour Bottom (no thermals): 77,77 arc180 79.2,79.4 arc180
N$310
  Bottom 0.254: IC5.12 111.25,25.39 C16.2
N$311
  Bottom 0.254: 91.77,26.64 IC5.4 82.79,26.66 C13.1
N$321
  Bottom 0.254: D31.C R71.2 118.14,70.5 120.38,70.5 R36.1
N$331
  Bottom 0.254: 86.73,60.35 IC21.4 | 76.16,60.35 IC11.4 | PWS1.3 69.05,57.91 68.03,58.93 68.03,61.16 68.71,61.84 71.9,61.84 72.29,61.45 C23.1 72.58,61.37 75.13,61.37 IC11.4 | IC11.4 76.36,60.15 77.99,58.52 81.74,58.52 82.59,59.37 82.59,63.81 C9.2 85.55,63.27 85.55,62.61 86.79,61.37 IC21.4 | IC21.4 86.93,60.15 87.34,60.15 88.96,58.52 92.34,58.52 93.11,59.29 93.11,63.73 C8.2 | 101.02,60.28 101.02,59.58 102.08,58.52 106.48,58.52 107.34,59.38 107.34,63.76 C7.2 | C8.2 | C6.2 117.93,63.75 117.93,59.37 117.08,58.52 112.34,58.52 111.59,59.27 IC4.4 111.59,62.03 C7.2 | 108.62,65 C7.2 | IC3.4 99.11,60.31 C8.2
  pour Bottom (isolate 0.406, no thermals): 66,57 125,57 125,72 66,72
N$341
  Bottom 0.254: X21.2 109.17,76.93 R81.1
  pour Bottom (no thermals): 106.8,77 arc180 109,79.4 arc180
N$351
  Bottom 0.254: R81.2 R37.1 101.75,74.77 D41.C
N$361
  Bottom 0.254: R29.2 108.87,20 111.86,17.01 111.86,15.86 IC7.3
N$371
  Bottom 0.254: SW11.4 120.86,3.66 103.01,3.66 99.11,7.56 | 99.12,8.13 IC7.9 99.11,7.56 | IC6.9 77.61,7.53 80.54,4.6 96.15,4.6 99.11,7.56
N$381
  Bottom 0.254: IC4.7 116.67,44.27 R211.3
N$391
  Bottom 0.254: IC4.6 114.13,44.27 R221.3
N$401
  Bottom 0.254: R41.2 110.9,47 110.9,41.82 112.22,40.5 R221.2 R221.1 112.9,34.82 C15.1
N$410
  Bottom 0.254: IC5.11 97.41,26.64 C17.2
N$411
  Bottom 0.254: 112.89,68.53 R171.3 | X21.3 D31.A 112.86,71.97 R171.3 | R171.3 113.88,67.48 C20.1 114.08,63.05 114.08,60.88 114.13,60.83 IC4.3
  pour Bottom (no thermals): 111.8,77 arc180 114,79.4 arc180
N$421
  Bottom 0.254: R31.2 115.4,42.13 117.03,40.5 R211.2 R211.1 117.9,33.32 C14.1
N$431
  Bottom 0.254: IC3.6 103.53,44.27 R281.3
N$441
  Bottom 0.254: IC3.7 106.07,44.27 R271.3
N$451
  Bottom 0.254: R281.1 R281.2 101.63,40.5 100.31,41.82 100.31,47.01 R191.2 | 102.37,38.2 R281.1 | R281.1 102.37,37.8 102.92,37.8 C17.1
N$461
  Bottom 0.254: R201.2 104.8,42.14 106.44,40.5 R271.2 R271.1 107.3,36.92 C16.1
N$471
  Bottom 0.203: 123.6,4.08 SW11.5
  Bottom 0.254: 101.56,8.33 IC7.10 | 101.76,8.13 IC7.10 | IC6.10 80.19,8.15 80.19,7.39 82.3,5.28 82.42,5.24 95.74,5.24 97.61,7.11 97.61,9.43 98,9.82 100.6,9.82 100.71,9.75 101.66,8.8 IC7.10 | IC7.10 101.66,7.39 103.82,5.23 122.45,5.23 123.6,4.08
N$481
  Bottom 0.254: 104,8.33 IC7.11 | 82.66,8.33 IC6.11 82.87,8.13 82.87,7.32 83.05,7.32 84.48,5.88 95.65,5.88 96.85,7.08 96.85,9.71 97.44,10.3 102.73,10.3 104.19,8.84 IC7.11 | 126.16,3.47 SW11.6 126.15,4.07 124.37,5.85 105.36,5.85 104.19,7.02 IC7.11
N$491
  Bottom 0.254: R30.2 IC6.3
N$510
  Bottom 0.254: X11.3 88.03,78.13 D21.A 88.03,68.53 R101.3 89.08,67.48 C19.1 89.28,63.05 89.28,61.05 89.33,61 IC21.3
  pour Bottom (no thermals): 87,77 arc180 89.2,79.4 arc180
N$511
  Bottom 0.254: R311.1 86.53,19.15 R32.2 87.8,15.84 IC6.4 | 87.54,15.44 87.74,15.65 IC6.4 | IC6.12 85.3,8.33 85.3,12.8 87.74,15.24 | 87.74,15.24 89.57,13.41 105.01,13.41 106.73,15.13 | 87.74,15.24 87.54,15.44 | 87.54,15.44 IC6.4 | 106.73,15.13 IC7.5 | IC7.14 111.81,10.05 106.73,15.13
N$521
  Bottom 0.254: IC5.6 91.45,29.2 91.28,29.03 90.94,29.03 C11.1 | 92.21,29.26 91.81,29.26 IC5.6 | IC5.6 91.81,29.06 92.21,29.06 IC5.6 | C11.1 87.23,28.51 82.35,28.51 79.85,26.01 75.84,26.01 S11.1 | C11.1 89.39,30.67 89.39,31.73 91.56,33.9 D51.A 93.24,35 R33.1
N$531
  Bottom 0.254: R91.1 83.14,68.98 81.62,70.5 78.68,70.5 R34.2
N$541
  Bottom 0.254: R101.1 95.57,68.5 R35.2
N$551
  Bottom 0.254: R171.1 120.92,68.5 R36.2
N$561
  Bottom 0.254: R37.2 103.46,70.52 106.4,70.52 107.94,68.98 R181.1
N$581
  Bottom 0.254: 97.4,30.48 IC5.8 98.48,30.47 R241.2 101.11,27.84 Q11.D
N$610
  Bottom 0.254: X11.2 84.37,76.93 R51.1
  pour Bottom (no thermals): 82,77 arc180 84.2,79.4 arc180
N$611
  Bottom 0.254: IC5.7 91.81,30.48 93.05,30.48 94.47,31.9 99.72,31.9 103.07,28.55 103.93,28.55 104.47,29.09 108.31,29.09 124.03,29.09 R261.1 | 124.11,29.26 R261.1 | 123.91,29.06 R261.1 | Q21.D R261.1
N$691
  Bottom 0.203: P11.4 124.34,78.29 124.34,75.88 127.04,73.18 127.04,40.25 124.09,37.3
  Bottom 0.254: 124.11,37.19 R251.1 | Q21.S 124.05,37.28 R251.1 | 124.09,37.3 R251.1
N$710
  Bottom 0.254: R51.2 R34.1 76.95,74.77 D17.C
N$711
  Bottom 0.203: 121.93,27.89 R231.1 122.03,27.89 124.88,27.89 127.68,30.69 127.68,74.97 P11.3 125.28,77.27
  Bottom 0.254: R231.1 121.99,27.89 108.67,27.89 106.82,27.89 104.82,27.89 Q11.S

## Text on the board
Bottom: 8DI/8DO | 4AI
tNames: 5.0V | SDA | GND | P1 | 3.3V | SCL | INT/NC | 5.0V | SDA | GND | P1 | 3.3V | SCL | INT/NC